# Altium PCB Backlight.PcbDoc
Units mil, origin at the board's own origin, x right, y up, seen from the top; angles counter-clockwise.
Board outline 1155 x 1150 mil, 2 copper layers (Top Layer, Bottom Layer); 8 components, 7 nets, 23 pads, 0 vias.
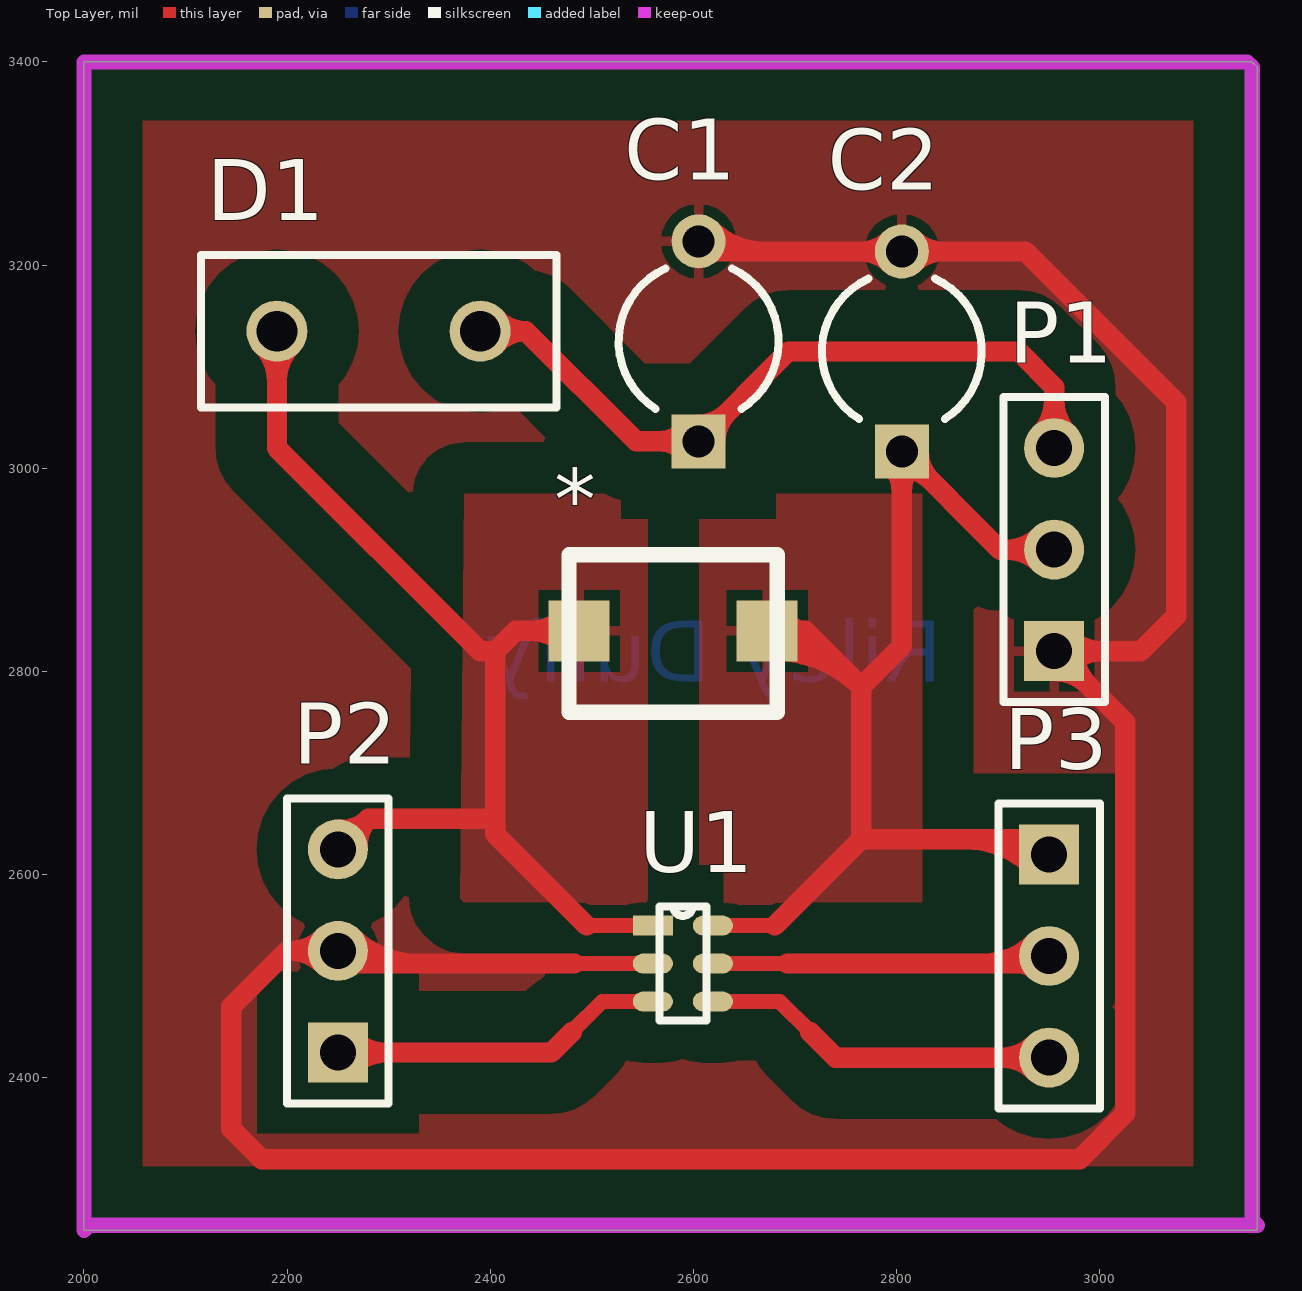
[diagram p0: Top Layer view]
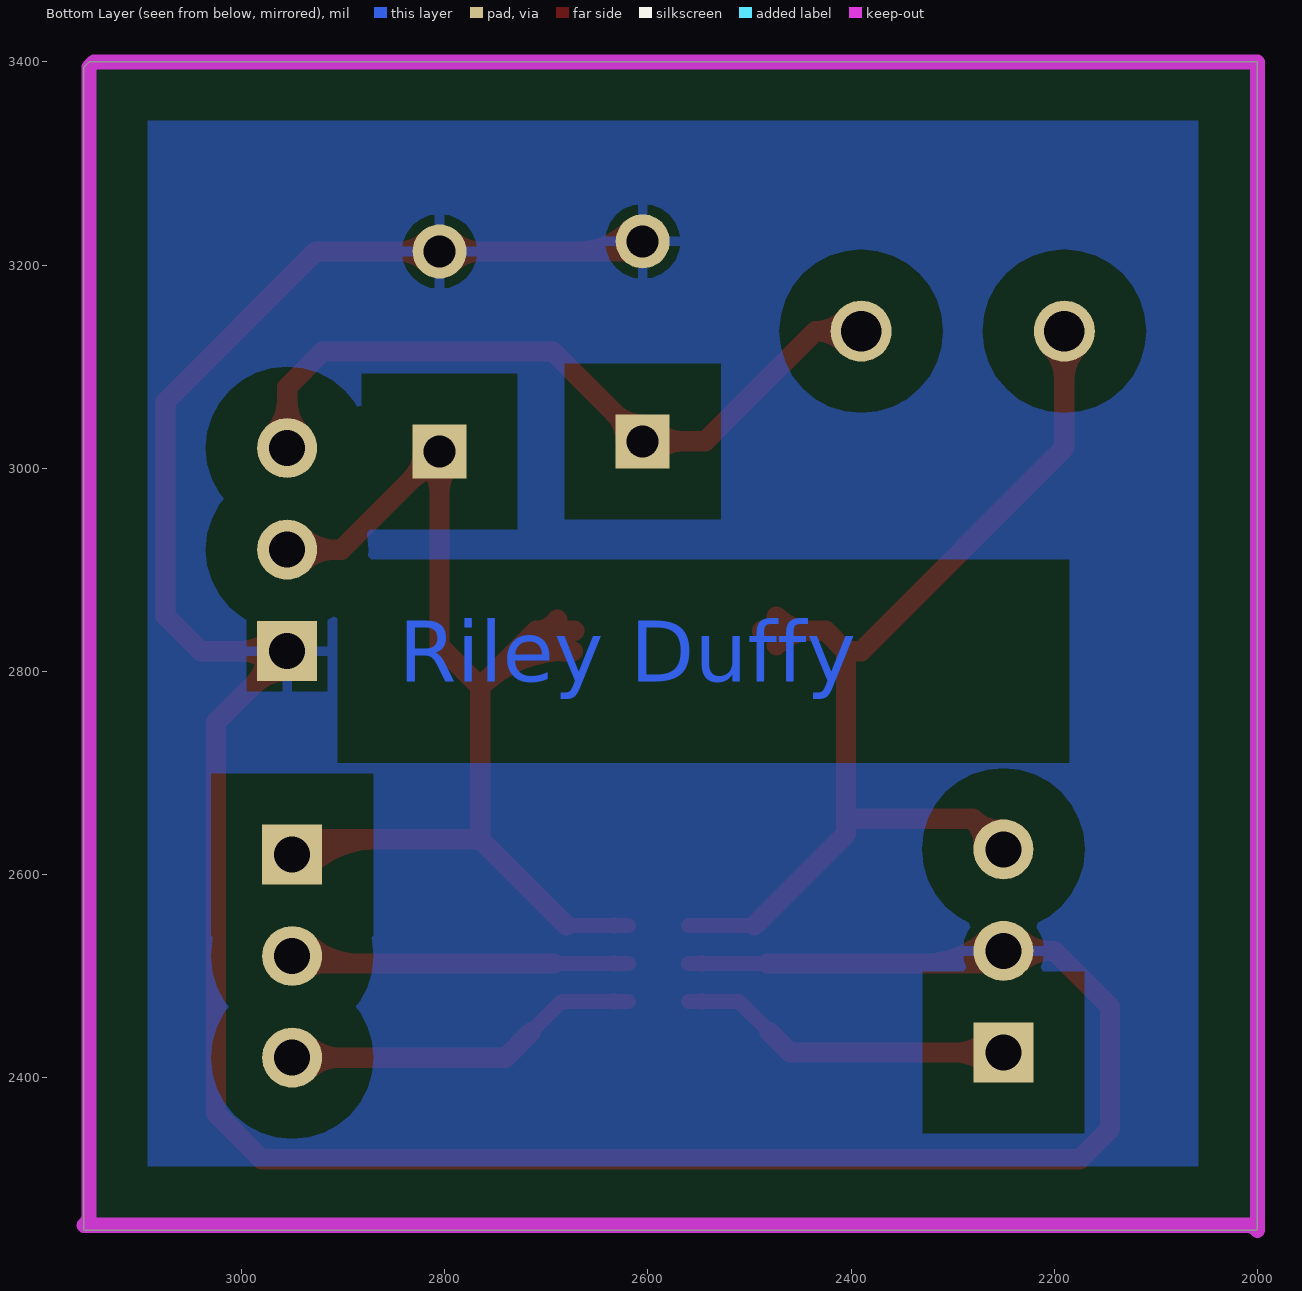
[diagram p1: Bottom Layer view, seen from below]

## Layer stack, top to bottom
Top Layer: signal copper 1.4
Dielectric: dielectric 12.6, FR-4, Dk 4.8
Bottom Layer: signal copper 1.4

## Board outline
2000,3400 2000,2250 3155,2250 3155,3395 3150,3400

## Design rules (kind name [scope] priority, off if disabled: settings)
Clearance Polygon [InPoly] p1: gap=50
Clearance [All] p2: gap=10
PolygonConnect [All] p1: connectstyle=Relief reliefconductorwidth=10 reliefentries=4 polygonreliefangle="90 Angle" airgapwidth=10
RoutingLayers [All] p1: top layer_v5=TRUE bottom layer_v5=FALSE
RoutingVias [All] p1: holewidth=28 width=50 viastyle="Through Hole" minholewidth=28 minwidth=50 maxholewidth=28 maxwidth=50
SilkscreenOverComponentPads [All] p1: minsilkscreentomaskgap=10
SolderMaskExpansion [All] p1: expansion=4
Width [All] p1: maxlimit=30 minlimit=10 preferedwidth=20
26 further rules are at their usual default settings.

## Components (designator, comment, footprint, x,y, rotation, side; value= is the part's Value field where it differs from the comment)
* "Inductor" Inductor 2580,2840 r0 top
C1 "Cap2" CAPR5-4X5 2605,3125 r90 top
C2 "Cap2" CAPR5-4X5 2805,3115 r90 top
D1 "D Schottky" RAD-0.2 2290,3135 r0 top
P1 "Header 3" HDR1X3 2955,2820 r90 top
P2 "Header 3" HDR1X3 2250,2425 r90 top
P3 "Header 3" HDR1X3 2950,2620 r270 top
U1 "LT1932" SOT6 2560,2550 r0 top

## Footprints (in the part's own frame and the unit in brackets; to place one, negate y for a bottom-side part, rotate by r counter-clockwise, add the part's x,y. Pads: shape width x height; smd on the part's side, far side on the other; paste and mask are expansions set on the pad)
CAPR5-4X5 [mm] "Capacitor; 2 Leads"
  rect 1.35x1.35 hole 0.8: 1(-2.5,0)
  round 1.35 hole 0.8: 2(2.5,0)
  silkscreen extent -1.69,-2 1.82,2
HDR1X3 [mm] "Connector; Header; 3 Position"
  rect 1.5x1.5 hole 0.9: 1(0,0)
  round 1.5 hole 0.9: 2(2.54,0) 3(5.08,0)
  silkscreen extent -1.27,-1.27 6.35,1.27
Inductor [mil]
  rect 60x60 smd: 1(-92.5,0) 2(92.5,0)
  silkscreen extent -102,-80 102,75
RAD-0.2 [mil] "Radial Cap, Thru-Hole; 2 Leads; 0.2 in Pin Spacing"
  round 60 hole 40: 1(-100,0) 2(100,0)
  silkscreen extent -175,-75 175,75
SOT6 [mm]
  rect 1x0.5 smd: 1(0,0)
  oval 1x0.5 smd: 2(0,-0.95) 3(0,-1.9) 4(1.5,-1.9) 5(1.5,-0.95) 6(1.5,0)
  silkscreen extent 0.17,-2.38 1.33,0.48

## Part data
C1 C2: "Capacitor"
D1: "Schottky Diode"
P1 P2 P3: "Header, 3-Pin"

## Nets (pads, with @x,y where several pads share a name; then routed paths per layer and width w, separated by ;. In a path a pad name is that pad's centre, name@x,y a point inside that pad or via, vN(x,y) a via of type N, cw(c..) or ccw(c..) an arc to the next point about the centre after c; other vN are vias at no path point)
GROUND: C1.2 C2.2 P1.1 P2.2 U1.2 | length 3365.2
  Top Layer w10: U1.2@2546.73,2509.17 ccw(c2538.47,2500.91) 2538.47,2512.6 ccw(c2538.47,2524.29) U1.2@2546.73,2516.02
  Top Layer w15: 2482.6,2512.6 U1.2
  Top Layer w20: P2.2@2236.19,2511.19 ccw(c2202.86,2477.86) 2202.86,2525 ccw(c2202.86,2572.14) P2.2@2236.19,2538.81 ; P2.2@2249.67,2524.67 ccw(c2278.8,2553.8) 2278.8,2512.6 ; P2.2@2263.81,2538.81 ccw(c2327.08,2602.08) 2327.08,2512.6 ; 2482.6,2512.6 2262.4,2512.6 P2.2 2200,2525 2145,2470 2145,2350 2175,2320 2980,2320 3025,2365 3025,2750 P1.1 3040,2820 3075,2855 3075,3065 2926.57,3213.43 C2.2 2615,3213.43 C1.2 ; C1.2@2616.72,3235.15 ccw(c2669.16,3287.58) 2669.16,3213.43 ; C2.2@2793.28,3201.71 ccw(c2764.99,3173.41) 2764.99,3213.43 ccw(c2764.99,3253.44) C2.2@2793.28,3225.15 ; C2.2@2816.72,3201.71 cw(c2845.02,3173.41) 2845.02,3213.43 cw(c2845.02,3253.44) C2.2@2816.72,3225.15 ; P1.1@2955,2800.47 cw(c2955,2753.33) 2988.34,2786.66 cw(c3021.67,2820) P1.1@2974.53,2820 ; P1.1@2968.81,2806.19 cw(c3002.14,2772.86) 3002.14,2820 cw(c3002.14,2867.14) P1.1@2968.81,2833.81
Net*_1: *.1 D1.1 P2.3 U1.1 | length 1257.7
  Top Layer w15: 2495,2550 U1.1
  Top Layer w20: D1.1@2175.86,3120.86 cw(c2141.72,3086.72) 2190,3086.72 cw(c2238.28,3086.72) D1.1@2204.14,3120.86 ; D1.1 2190,3020 2390,2820 2405,2820 ; P2.3 2280,2655 ; P2.3@2251.51,2644.47 ccw(c2254.32,2680.68) 2280,2655 ; P2.3@2269.47,2626.51 cw(c2305.68,2629.32) 2280,2655 ; *.1@2473.36,2825.86 ccw(c2439.22,2791.72) 2439.22,2840 ccw(c2439.22,2888.28) *.1@2473.36,2854.14 ; *.1 2425,2840 2405,2820 ; 2495,2550 2405,2640 2405,2655 ; 2280,2655 2405,2655 ; 2405,2655 2405,2820
NetC1_1: C1.1 D1.2 P1.3 | length 988.8
  Top Layer w20: D1.2 2435,3135 ; D1.2@2404.85,3121.6 cw(c2435,3094.38) 2435,3135 ; D1.2@2404.85,3148.4 ccw(c2435,3175.62) 2435,3135 ; C1.1@2593.28,3014.85 ccw(c2564.98,2986.56) 2564.98,3026.57 ccw(c2564.98,3066.59) C1.1@2593.28,3038.29 ; C1.1@2605,3043.15 ccw(c2605,3083.16) 2633.29,3054.87 ccw(c2661.59,3026.57) C1.1@2621.57,3026.57 ; P1.3@2941.19,3033.81 ccw(c2907.86,3067.14) 2955,3067.14 ccw(c3002.14,3067.14) P1.3@2968.81,3033.81 ; P1.3 2955,3080 2920,3115 2693.43,3115 C1.1 2543.43,3026.57 2435,3135
NetP2_1: P2.1 U1.3 | length 423.2
  Top Layer w10: U1.3@2546.73,2471.77 ccw(c2538.47,2463.51) 2538.47,2475.2 ccw(c2538.47,2486.89) U1.3@2546.73,2478.62
  Top Layer w15: 2480,2445 2510.2,2475.2 U1.3
  Top Layer w20: P2.1 2460,2425 2480,2445 ; P2.1@2263.81,2411.19 cw(c2297.14,2377.86) 2297.14,2425 cw(c2297.14,2472.14) P2.1@2263.81,2438.81
NetP3_2: P3.2 U1.5 | length 426.4
  Top Layer w10: U1.5@2632.32,2509.17 cw(c2640.59,2500.91) 2640.59,2512.6 cw(c2640.59,2524.29) U1.5@2632.32,2516.02
  Top Layer w15: U1.5 2692.4,2512.6
  Top Layer w20: 2692.4,2512.6 2942.6,2512.6 P3.2 ; 2884.99,2512.6 ccw(c2884.99,2585.01) P3.2@2936.19,2533.81 ; 2920.73,2512.6 cw(c2920.73,2490.73) P3.2@2936.19,2506.19
NetP3_3: P3.3 U1.4 | length 446.2
  Top Layer w10: U1.4@2632.32,2471.77 cw(c2640.59,2463.51) 2640.59,2475.2 cw(c2640.59,2486.89) U1.4@2632.32,2478.62
  Top Layer w15: U1.4 2684.8,2475.2 2715,2445
  Top Layer w20: 2715,2445 2740,2420 P3.3 ; P3.3@2936.19,2406.19 ccw(c2902.86,2372.86) 2902.86,2420 ccw(c2902.86,2467.14) P3.3@2936.19,2433.81
VIN: *.2 C2.1 P1.2 P3.1 U1.6 | length 1627.7
  Top Layer w10: U1.6@2632.32,2546.58 cw(c2640.59,2538.31) 2640.59,2550 cw(c2640.59,2561.69) U1.6@2632.32,2553.42
  Top Layer w15: U1.6 2680,2550
  Top Layer w20: *.2@2673.57,2820.03 cw(c2680.02,2700.03) 2765,2785 ; 2680,2550 2765,2635 ; *.2@2689.11,2828.86 cw(c2710,2814.85) 2710,2840 ; *.2@2689.11,2851.14 ccw(c2710,2865.15) 2710,2840 ; 2733.29,2816.71 ccw(c2676.79,2760.21) *.2 2710,2840 ; C2.1@2793.28,3004.85 cw(c2764.98,2976.56) 2805,2976.56 cw(c2845.01,2976.56) C2.1@2816.72,3004.85 ; C2.1@2805,3000 cw(c2805,2959.98) 2833.29,2988.28 cw(c2861.59,3016.57) C2.1@2821.57,3016.57 ; 2866.64,2635 cw(c2866.64,2536.64) P3.1@2936.19,2606.19 ; 2914.93,2635 cw(c2914.93,2584.93) P3.1@2950.33,2620.33 ; P1.2@2941.19,2906.19 ccw(c2907.86,2872.86) 2907.86,2920 ccw(c2907.86,2967.14) P1.2@2941.19,2933.81 ; P3.1 2935,2635 2765,2635 ; P1.2 2901.57,2920 C2.1 2805,2825 2765,2785 ; 2710,2840 2765,2785 ; 2765,2635 2765,2785

## Polygon pours and split planes (outlines as drawn)
GROUND on Top Layer "Switch" (solid, pour order 8): 1980,3435 1980,2240 3155,2240 3160,2245 3160,3430
VIN on Top Layer "Switch" (solid, pour order 6): 2530,2975 2530,2535 2798.78,2535 2825,2555 2825,2975 2818.44,2975
Net*_1 on Top Layer "Switch" (solid, pour order 2): 2374.3,2975 2524.88,2975 2542.09,2975 2555,2975 2555,2520 2370,2520
GROUND on Bottom Layer "Switch" (solid, pour order 10): 1980,3435 1980,2240 3155,2240 3155,3425 3160,3430

## Keep-outs
Keep-Out Layer:
  lines w15: 2000,2250 2005,2255 3155,2255 3150,2260 3150,3395 3145,3400 2000,3400 2000,2250

## Other copper
Bottom Layer:
  text "Riley Duffy" at 2845,2790 h60